# EAGLE board rca-board (EAGLE 6.6.0)
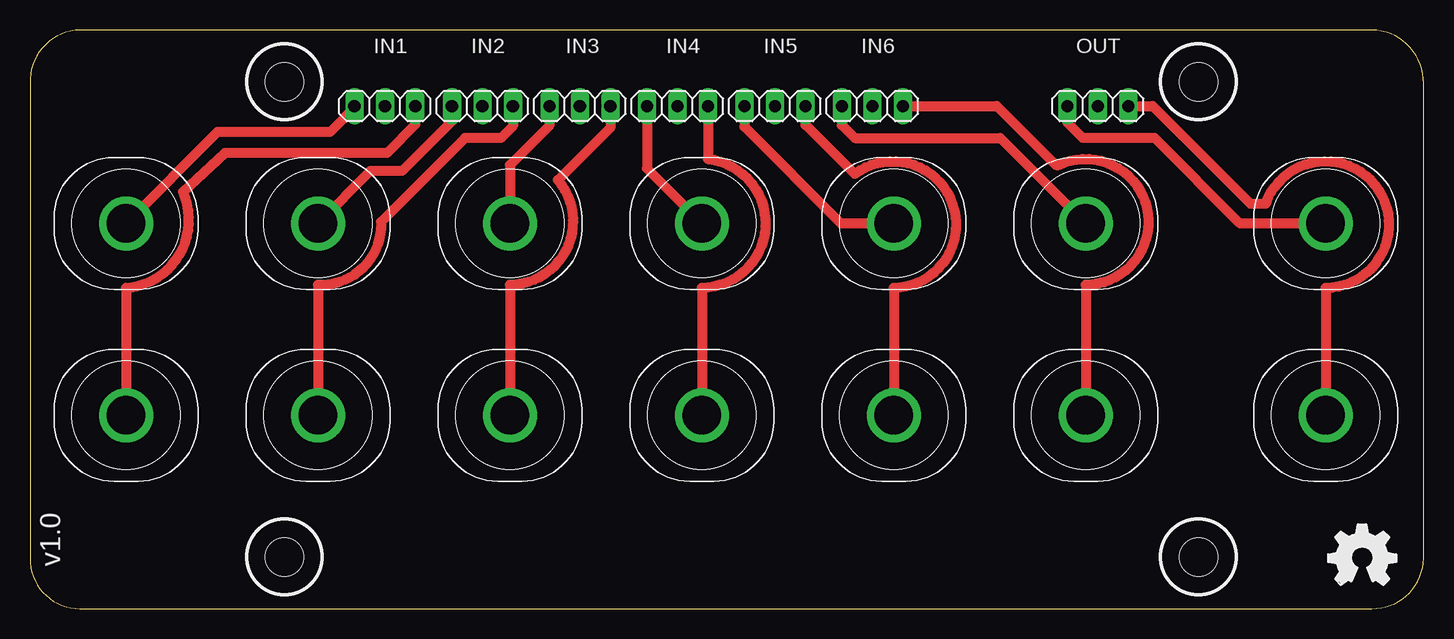
[diagram p0: board, top side]
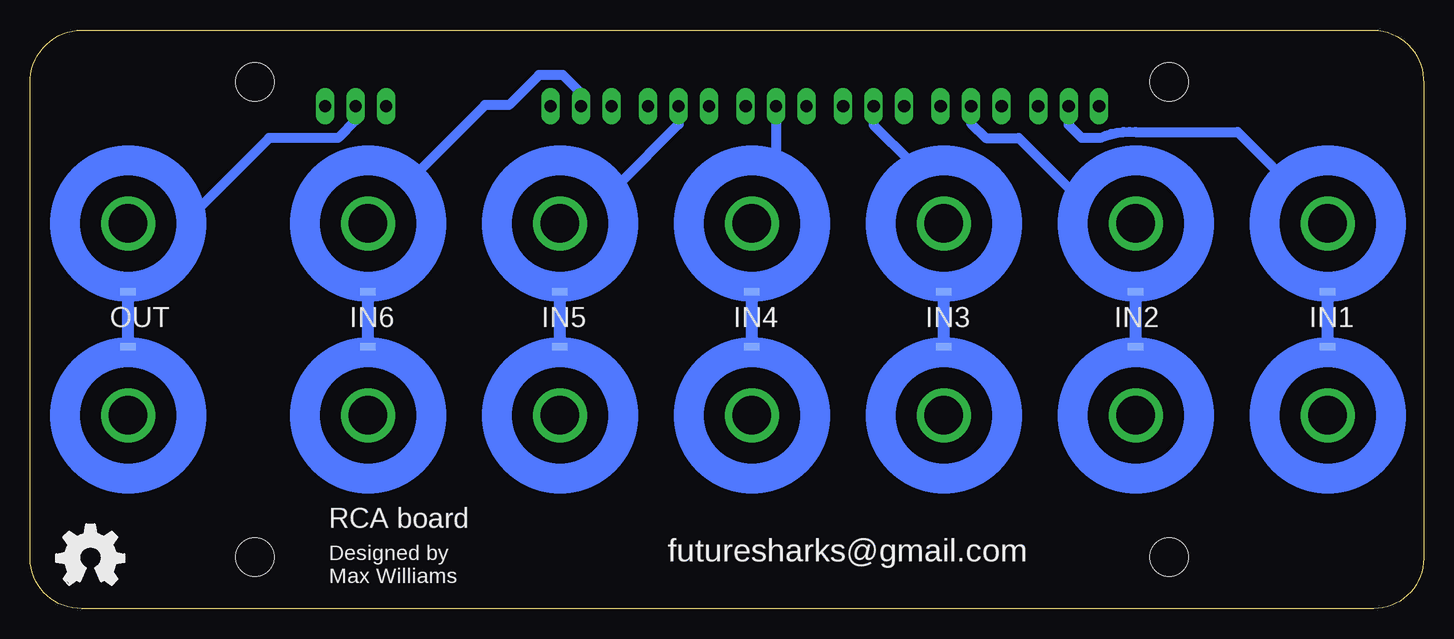
[diagram p1: board, bottom side, seen from below]

Size 116.17 x 48.26 mm. Coordinates in mm from the lower left corner, seen from the top.
Outline: 4.15,0 111.85,0 arc90 116.17,4.19 116.17,43.81 arc90 111.85,48.26 4.15,48.26 arc90 0,43.81 0,4.19 arc90 4.15,0
Copper layers (1*16): Top 0.035mm / dielectric 1.5mm / Bottom 0.035mm
Design rules "default": minimum track width 10mil, minimum drill 24mil, track to track 8mil, track to pad 8mil, pad to pad 8mil, via to via 8mil, smd to smd 8mil, copper to edge 40mil, drill to drill 8mil, minimum pad ring 10mil, minimum via ring 8mil, stop-mask expansion 4mil, vias tented up to drill 0mil, thermal gap 10mil
Holes 3.2 mm at 21.2,43.94 97.4,43.94 97.4,4.32 21.2,4.32

## Footprints (pad centres in the part's own frame; a part is rotated, then mirrored left to right if it is on the bottom)
1X03 = drill 1.016 long: 1 -2.54,0; 2 0,0; 3 2.54,0
CMC_RCA_816 = smd 0.635 x 1.27 bottom: GND 5.7,0 | drill 3.2 pad 4.5: SIGNAL 0,0

## Placement (x,y rotation side)
IN1  [1X03]  29.58,41.91 180 top
IN2  [1X03]  37.71,41.91 180 top
IN3  [1X03]  45.84,41.91 180 top
IN4  [1X03]  53.97,41.91 180 top
IN5  [1X03]  62.1,41.91 180 top
IN6  [1X03]  70.22,41.91 180 top
LOGO1  OSHW_LOGO_FILLX0200-NT  [OSHW_FILLX200_NOTEXT]  113.96,1.97 0 bottom
LOGO2  OSHW_LOGO_FILLX0200-NT  [OSHW_FILLX200_NOTEXT]  108.21,1.97 0 top
OUT  [1X03]  89.02,41.91 180 top
RCA1L  CMC_RCA816  [CMC_RCA_816]  8,32.13 270 top
RCA1R  CMC_RCA816  [CMC_RCA_816]  8,16.13 90 top
RCA2L  CMC_RCA816  [CMC_RCA_816]  24,32.13 270 top
RCA2R  CMC_RCA816  [CMC_RCA_816]  24,16.13 90 top
RCA3L  CMC_RCA816  [CMC_RCA_816]  40,32.13 270 top
RCA3R  CMC_RCA816  [CMC_RCA_816]  40,16.13 90 top
RCA4L  CMC_RCA816  [CMC_RCA_816]  56,32.13 270 top
RCA4R  CMC_RCA816  [CMC_RCA_816]  56,16.13 90 top
RCA5L  CMC_RCA816  [CMC_RCA_816]  72,32.13 270 top
RCA5R  CMC_RCA816  [CMC_RCA_816]  72,16.13 90 top
RCA6L  CMC_RCA816  [CMC_RCA_816]  88,32.13 270 top
RCA6R  CMC_RCA816  [CMC_RCA_816]  88,16.13 90 top
RCAOUTL  CMC_RCA816  [CMC_RCA_816]  108,32.13 270 top
RCAOUTR  CMC_RCA816  [CMC_RCA_816]  108,16.13 90 top

## Library data of the parts
IN1-IN6 OUT = pinhead
LOGO1 LOGO2 = ohw-logo
RCA1L RCA1R RCA2L RCA2R RCA3L RCA3R RCA4L RCA4R RCA5L RCA5R RCA6L RCA6R RCAOUTL RCAOUTR = cmc-rca-sockets

## Nets
GND1: IN1.2 RCA1L.GND RCA1R.GND
GND2: IN2.2 RCA2L.GND RCA2R.GND
GND3: IN3.2 RCA3L.GND RCA3R.GND
GND4: IN4.2 RCA4L.GND RCA4R.GND
GND5: IN5.2 RCA5L.GND RCA5R.GND
GND6: IN6.2 RCA6L.GND RCA6R.GND
GNDOUT: OUT.2 RCAOUTL.GND RCAOUTR.GND
N$1: IN2.3 RCA2L.SIGNAL
N$2: IN1.3 RCA1L.SIGNAL
N$3: IN3.3 RCA3L.SIGNAL
N$4: IN2.1 RCA2R.SIGNAL
N$5: IN4.3 RCA4L.SIGNAL
N$6: IN3.1 RCA3R.SIGNAL
N$7: IN5.3 RCA5L.SIGNAL
N$8: IN4.1 RCA4R.SIGNAL
N$9: IN6.3 RCA6L.SIGNAL
N$10: IN5.1 RCA5R.SIGNAL
N$11: OUT.1 RCAOUTR.SIGNAL
N$12: IN6.1 RCA6R.SIGNAL
N$13: IN1.1 RCA1R.SIGNAL
N$15: OUT.3 RCAOUTL.SIGNAL

## Tracks (layer width: path | path; a pad name or v marks a point on that pad's centre or on a via)
GND1
  Bottom 0.813: IN1.2 29.58,40.33 28.5,39.25 27,39.25 arc27 24,39.75 15.5,39.75 12,36.25 arc-137 RCA1L.GND
  Bottom 1.016: RCA1R.GND RCA1L.GND
GND2
  Bottom 0.813: IN2.2 37.71,40.46 36.5,39.25 33.75,39.25 29.25,34.75 arc-115 RCA2L.GND
  Bottom 1.016: RCA2R.GND RCA2L.GND
GND3
  Bottom 0.813: IN3.2 45.84,40.34 42.75,37.25 arc-152 RCA3L.GND
  Bottom 1.016: RCA3R.GND RCA3L.GND
GND4
  Bottom 0.813: IN4.2 53.97,37.53 54,37.5 arc160 RCA4L.GND
  Bottom 1.016: RCA4R.GND RCA4L.GND
GND5
  Bottom 0.813: IN5.2 62.1,40.4 67.25,35.25 arc120 RCA5L.GND
  Bottom 1.016: RCA5R.GND RCA5L.GND
GND6
  Bottom 0.813: IN6.2 70.22,42.97 71.75,44.5 73.75,44.5 76.25,42 78.25,42 84,36.25 arc135 RCA6L.GND
  Bottom 1.016: RCA6R.GND RCA6L.GND
GNDOUT
  Bottom 0.813: OUT.2 89.02,40.73 90.5,39.25 96.25,39.25 102.25,33.25 arc98 RCAOUTL.GND
  Bottom 1.016: RCAOUTR.GND RCAOUTL.GND
N$1
  Top 0.813: IN2.3 35.17,40.67 31,36.5 28.37,36.5 RCA2L.SIGNAL
N$2
  Top 0.813: IN1.3 27.16,41.91 25,39.75 15.62,39.75 RCA1L.SIGNAL
N$3
  Top 0.813: IN3.3 43.3,40.3 40,37 RCA3L.SIGNAL
N$4
  Top 0.813: IN2.1 40.25,40.25 39.25,39.25 36.25,39.25 29.25,32.25 29.25,31.75 arc-90 24,27 RCA2R.SIGNAL
N$5
  Top 0.813: IN4.3 51.43,36.7 RCA4L.SIGNAL
N$6
  Top 0.813: RCA3R.SIGNAL 40,27 arc130 44,35.75 48.38,40.13 IN3.1
N$7
  Top 0.813: IN5.3 59.56,40.19 67.62,32.13 RCA5L.SIGNAL
N$8
  Top 0.813: IN4.1 56.51,37.49 arc-173 56,26.75 RCA4R.SIGNAL
N$9
  Top 0.813: IN6.3 67.68,40.32 68.75,39.25 80.88,39.25 RCA6L.SIGNAL
N$10
  Top 0.813: IN5.1 64.64,40.36 68.75,36.25 arc-216 72,26.75 RCA5R.SIGNAL
N$11
  Top 0.813: RCAOUTR.SIGNAL 108,26.75 arc251 103,33.75 101.75,33.75 93.59,41.91 OUT.1
N$12
  Top 0.813: RCA6R.SIGNAL 88,27 arc205 85.75,37 85.5,37 80.59,41.91 IN6.1
N$13
  Top 0.813: IN1.1 32.12,40.37 29.75,38 16.25,38 12.75,34.75 arc-110 8,26.75 RCA1R.SIGNAL
N$15
  Top 0.813: OUT.3 86.48,40.52 87.75,39.25 93.75,39.25 100.87,32.13 RCAOUTL.SIGNAL

## Text on the board
tNames: v1.0
bNames: IN1 | IN2 | IN3 | IN4 | IN5 | IN6 | OUT | RCA board | futuresharks@gmail.com | Designed by / Max Williams